# EAGLE board power (EAGLE 9.6.2)
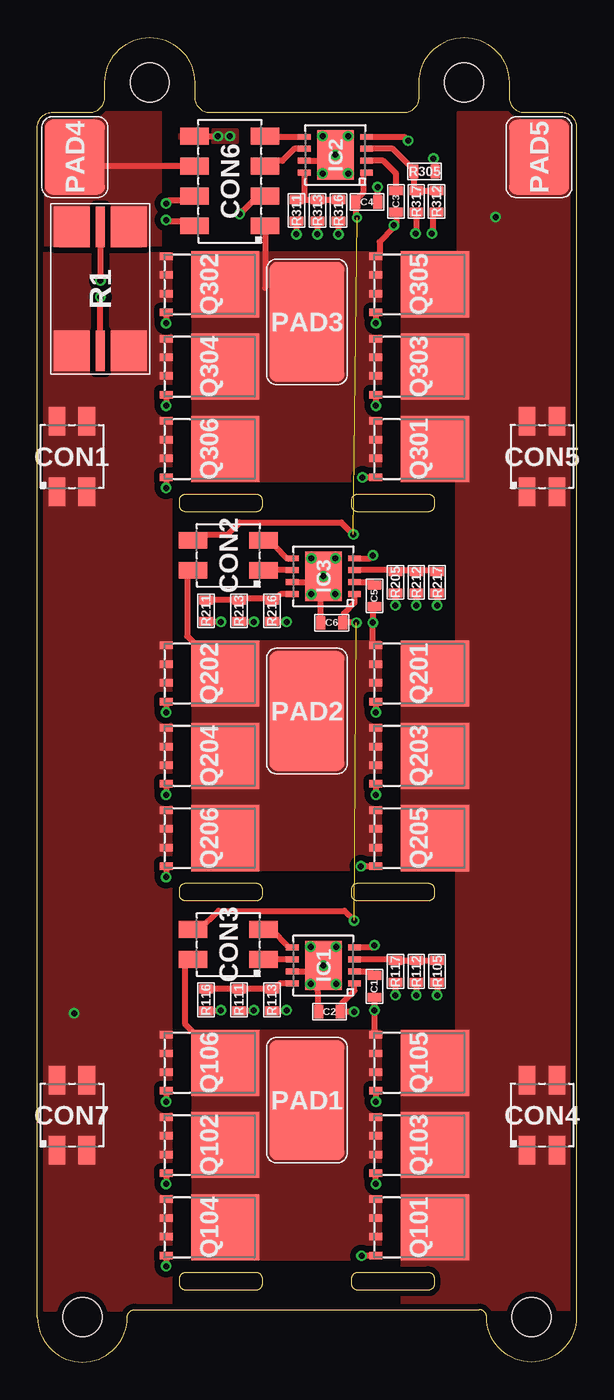
[diagram p0: board, top side]
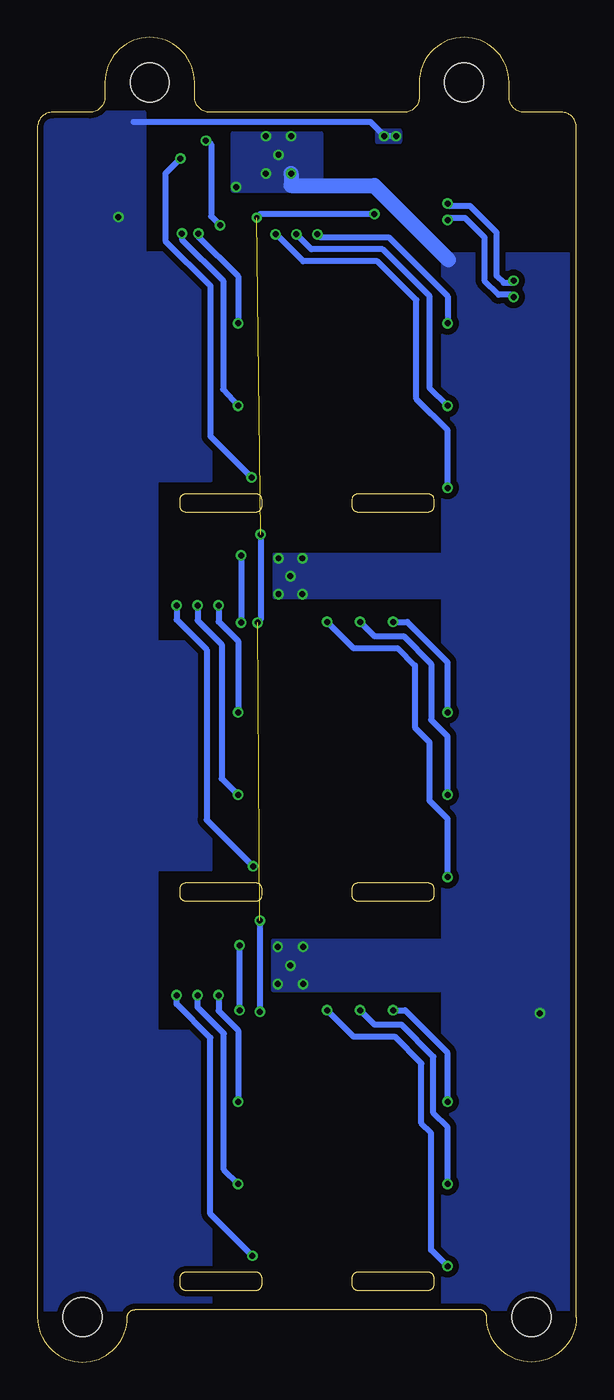
[diagram p1: board, bottom side, seen from below]

Size 36 x 88.5 mm. Coordinates in mm from the lower left corner, seen from the top.
Outline: 30,3 arc90 29.5,3.5 6.5,3.5 arc90 6,3 arc-90 3,0 arc-90 0,3 0,82.5 arc-90 1,83.5 3.5,83.5 arc90 4.5,84.5 4.5,85.5 arc-90 7.5,88.5 arc-90 10.5,85.5 10.5,84.5 arc90 11.5,83.5 24.5,83.5 arc90 25.5,84.5 25.5,85.5 arc-90 28.5,88.5 arc-90 31.5,85.5 31.5,84.5 arc90 32.5,83.5 35,83.5 arc-90 36,82.5 36,3 arc-90 33,0 arc-90 30,3
Outline: 9.9,58 14.6,58 arc-90 15,57.6 15,57.2 arc-90 14.6,56.8 9.9,56.8 arc-90 9.5,57.2 9.5,57.6 arc-90 9.9,58
Outline: 26.5,57.6 26.5,57.2 arc-90 26.1,56.8 21.4,56.8 arc-90 21,57.2 21,57.6 arc-90 21.4,58 26.1,58 arc-90 26.5,57.6
Outline: 9.9,32 14.6,32 arc-90 15,31.6 15,31.2 arc-90 14.6,30.8 9.9,30.8 arc-90 9.5,31.2 9.5,31.6 arc-90 9.9,32
Outline: 26.5,31.6 26.5,31.2 arc-90 26.1,30.8 21.4,30.8 arc-90 21,31.2 21,31.6 arc-90 21.4,32 26.1,32 arc-90 26.5,31.6
Outline: 9.9,6 14.6,6 arc-90 15,5.6 15,5.2 arc-90 14.6,4.8 9.9,4.8 arc-90 9.5,5.2 9.5,5.6 arc-90 9.9,6
Outline: 26.5,5.6 26.5,5.2 arc-90 26.1,4.8 21.4,4.8 arc-90 21,5.2 21,5.6 arc-90 21.4,6 26.1,6 arc-90 26.5,5.6
Copper layers (1*16): Top 0.035mm / dielectric 1mm / Bottom 0.035mm
Design rules "pwrpcb *": minimum track width 0.4mm, minimum drill 0.3mm, track to track 0.4mm, track to pad 0.4mm, pad to pad 0.4mm, via to via 0.4mm, smd to smd 0.15mm, copper to edge 0.4mm, drill to drill 0.4mm, minimum pad ring 0.15mm, minimum via ring 0.15mm, stop-mask expansion 0.41mm, vias tented up to drill 0.41mm, thermal gap 8mil
Net classes: 1 HV: clearance 0.25 mm to class 0, clearance 0.25 mm
Holes 2.6 mm at 7.5,85.5 28.5,85.5 3,3 33,3

## Footprints (pad centres in the part's own frame; a part is rotated, then mirrored left to right if it is on the bottom)
C0603 = smd 0.6 x 0.9: 1 -0.725,0; 2 0.725,0
2X02-SMD-2-MALE = smd 1.9 x 1.12: 1 -2.35,1; 2 2.35,1; 3 -2.35,-1; 4 2.35,-1
2X04-SMD-2-MALE = smd 1.9 x 1.12: 1 -2.35,3; 2 2.35,3; 3 -2.35,1; 4 2.35,1; 5 -2.35,-1; 6 2.35,-1; 7 -2.35,-3; 8 2.35,-3
VDFN-8-HEAVY-PCB = smd 0.85 x 0.4: 1 -2.075,1.2; 2 -2.075,0.4; 3 -2.075,-0.4; 4 -2.075,-1.2; 5 2.075,-1.2; 6 2.075,-0.4; 7 2.075,0.4; 8 2.075,1.2 | smd 2.45 x 3.3: P$1 0,0
5X8 = smd 5 x 8: P$1 0,0
5X4 = smd 5 x 4: P$1 0,0
PG-TDSON-8-1 = smd 0.5 x 0.85: 1 -1.875,-2.9; 2 -0.625,-2.9; 3 0.625,-2.9; 4 1.875,-2.9 | smd 4.41 x 4.55: P$1 0,1.05
R3920-KELVIN = smd 2.7 x 2.4: 1 -4.15,1.9; 2 4.15,1.9; 11 -4.15,-1.9; 22 4.15,-1.9 | smd 2.7 x 0.6: S1 -4.15,0; S2 4.15,0
R0603 = smd 0.6 x 0.9: 1 -0.725,0; 2 0.725,0

## Placement (x,y rotation side)
C1  0.1uF  [C0603]  22.5,25.1 270 top
C2  0.1uF  [C0603]  19.5,23.4 180 top
C3  0.1uF  [C0603]  23.95,77.55 270 top
C4  0.1uF  [C0603]  22,77.5 0 top
C5  0.1uF  [C0603]  22.5,51.2 270 top
C6  0.1uF  [C0603]  19.65,49.4 180 top
CON1  PINHEAD_2X02-0877590414  [2X02-SMD-2-MALE]  2.3,60.5 90 top
CON2  PINHEAD_2X02-0877590414  [2X02-SMD-2-MALE]  12.75,53.9 180 top
CON3  PINHEAD_2X02-0877590414  [2X02-SMD-2-MALE]  12.75,27.9 180 top
CON4  PINHEAD_2X02-0877590414  [2X02-SMD-2-MALE]  33.7,16.5 90 top
CON5  PINHEAD_2X02-0877590414  [2X02-SMD-2-MALE]  33.7,60.5 90 top
CON6  PINHEAD_2X04-SMD-2-MALE  [2X04-SMD-2-MALE]  12.85,78.9 180 top
CON7  PINHEAD_2X02-0877590414  [2X02-SMD-2-MALE]  2.3,16.5 90 top
IC1  UCC272-VDFN-HEAVY_PCB  [VDFN-8-HEAVY-PCB]  19.1,26.5 180 top
IC2  UCC272-VDFN-HEAVY_PCB  [VDFN-8-HEAVY-PCB]  19.9,80.65 180 top
IC3  UCC272-VDFN-HEAVY_PCB  [VDFN-8-HEAVY-PCB]  19.1,52.5 180 top
PAD1  PAD-5X8  [5X8]  18,17.5 180 top
PAD2  PAD-5X8  [5X8]  18,43.5 180 top
PAD3  PAD-5X8  [5X8]  18,69.5 180 top
PAD4  PAD-5X4  [5X4]  2.5,80.5 270 top
PAD5  PAD-5X4  [5X4]  33.5,80.5 270 top
Q101  BSC077N12NS3GATMA1  [PG-TDSON-8-1]  25.5,9 270 top
Q102  BSC077N12NS3GATMA1  [PG-TDSON-8-1]  11.5,14.5 270 top
Q103  BSC077N12NS3GATMA1  [PG-TDSON-8-1]  25.5,14.5 270 top
Q104  BSC077N12NS3GATMA1  [PG-TDSON-8-1]  11.5,9 270 top
Q105  BSC077N12NS3GATMA1  [PG-TDSON-8-1]  25.5,20 270 top
Q106  BSC077N12NS3GATMA1  [PG-TDSON-8-1]  11.5,20 270 top
Q201  BSC077N12NS3GATMA1  [PG-TDSON-8-1]  25.5,46 270 top
Q202  BSC077N12NS3GATMA1  [PG-TDSON-8-1]  11.5,46 270 top
Q203  BSC077N12NS3GATMA1  [PG-TDSON-8-1]  25.5,40.5 270 top
Q204  BSC077N12NS3GATMA1  [PG-TDSON-8-1]  11.5,40.5 270 top
Q205  BSC077N12NS3GATMA1  [PG-TDSON-8-1]  25.5,35 270 top
Q206  BSC077N12NS3GATMA1  [PG-TDSON-8-1]  11.5,35 270 top
Q301  BSC077N12NS3GATMA1  [PG-TDSON-8-1]  25.5,61 270 top
Q302  BSC077N12NS3GATMA1  [PG-TDSON-8-1]  11.5,72 270 top
Q303  BSC077N12NS3GATMA1  [PG-TDSON-8-1]  25.5,66.5 270 top
Q304  BSC077N12NS3GATMA1  [PG-TDSON-8-1]  11.5,66.5 270 top
Q305  BSC077N12NS3GATMA1  [PG-TDSON-8-1]  25.5,72 270 top
Q306  BSC077N12NS3GATMA1  [PG-TDSON-8-1]  11.5,61 270 top
R1  200 µOhms  [R3920-KELVIN]  4.2,71.7 270 top
R105  4R3  [R0603]  26.7,26.1 270 top
R111  4R3  [R0603]  13.45,24.2 270 top
R112  4R3  [R0603]  25.3,26.1 270 top
R113  4R3  [R0603]  15.65,24.2 270 top
R116  4R3  [R0603]  11.25,24.2 270 top
R117  4R3  [R0603]  23.9,26.1 270 top
R205  4R3  [R0603]  23.9,52.1 270 top
R211  4R3  [R0603]  11.25,50.2 270 top
R212  4R3  [R0603]  25.3,52.1 270 top
R213  4R3  [R0603]  13.45,50.2 270 top
R216  4R3  [R0603]  15.65,50.2 270 top
R217  4R3  [R0603]  26.7,52.1 270 top
R305  4R3  [R0603]  25.85,79.55 0 top
R311  4R3  [R0603]  17.3,76.95 270 top
R312  4R3  [R0603]  26.65,77.55 270 top
R313  4R3  [R0603]  18.7,76.95 270 top
R316  4R3  [R0603]  20.1,76.95 270 top
R317  4R3  [R0603]  25.3,77.55 270 top

## Library data of the parts
C1-C6 = rc; AEC-Q: ---; DIGIKEY#: 1276-1006-1-ND; MANF: Samsung Electro-Mechanics; MANF#: CL10B104KA8NNNC; OPERATING_TEMP: -55°C ~ 125°C; PACKAGE: 0603; VOLTAGE: 25V
CON1-CON5 CON7 = pinhead; DIGIKEY#: WM18712-ND; MANF: Molex; MANF#: 0877590414
CON6 = pinhead; DIGIKEY#: WM14802-ND; MANF: Molex; MANF#: 0877590814
IC1-IC3 = mosfet_drivers; DIGIKEY#: 296-UCC27201ADRMRTR-ND; MANF: Texas Instruments; MANF#: UCC27201ADRMR
PAD1-PAD3 = PADS
PAD4 PAD5 = PADS; BOM: EXCLUDE
Q101-Q106 Q201-Q206 Q301-Q306 = mosfet; DIGIKEY#: BSC077N12NS3GATMA1CT-ND; MANF: Infineon Technologies; MANF#: BSC077N12NS3GATMA1; PACKAGE: TDSON-8-1
R1 = SHUNT_RESISTORS; DIGIKEY#: CSS2H-3920R-L200FCT-ND; LCSC#: C469432; MANF: Bourns Inc; MANF#: CSS2H-3920R-L200FCT-ND; OPERATING_TEMP: -55°C ~ 170°C; PACKAGE: 3920; POWER: 12W; TC: ±50ppm/°C; TOLERANCE: ±1%
R105 R111-R113 R116 R117 R205 R211-R213 R216 R217 R305 R311-R313 R316 R317 = rc; AEC-Q: AEC-Q200; DIGIKEY#: 10-ERJ-U03F4R30VCT-ND; MANF: Panasonic Electronic Components; MANF#: ERJ-U03F4R30V; OPERATING_TEMP: -55°C ~ 155°C; PACKAGE: 0603; TOLERANCE: 1%

## Nets
A_GH: IC1.3 R105.1 R112.1 R117.1
A_GL: IC1.8 R111.1 R113.1 R116.1
A_IH: CON3.3 IC1.5
A_IL: CON3.1 IC1.6
A_PH: C1.2 CON3.2 IC1.4 PAD1.P$1 Q101.1 Q101.2 Q101.3 Q102.P$1 Q103.1 Q103.2 Q103.3 Q104.P$1 Q105.1 Q105.2 Q105.3 Q106.P$1
B_GH: IC3.3 R205.1 R212.1 R217.1
B_GL: IC3.8 R211.1 R213.1 R216.1
B_IH: CON2.3 IC3.5
B_IL: CON2.1 IC3.6
B_PH: C5.2 CON2.2 IC3.4 PAD2.P$1 Q201.1 Q201.2 Q201.3 Q202.P$1 Q203.1 Q203.2 Q203.3 Q204.P$1 Q205.1 Q205.2 Q205.3 Q206.P$1
C_GH: IC2.3 R305.1 R312.1 R317.1
C_GL: IC2.8 R311.1 R313.1 R316.1
C_IH: CON6.7 IC2.5
C_IL: CON6.5 IC2.6
C_PH: C3.2 CON6.1 IC2.4 PAD3.P$1 Q301.1 Q301.2 Q301.3 Q302.P$1 Q303.1 Q303.2 Q303.3 Q304.P$1 Q305.1 Q305.2 Q305.3 Q306.P$1
CS+: CON6.2 R1.S2
CS-: CON6.4 R1.S1
N$1: C3.1 IC2.2
N$2: C5.1 IC3.2
N$13: C1.1 IC1.2
PGND: C2.2 C4.2 C6.2 CON1.1 CON1.2 CON1.3 CON1.4 CON7.1 CON7.2 CON7.3 CON7.4 IC1.7 IC1.P$1 IC2.7 IC2.P$1 IC3.7 IC3.P$1 Q102.1 Q102.2 Q102.3 Q104.1 Q104.2 Q104.3 Q106.1 Q106.2 Q106.3 Q202.1 Q202.2 Q202.3 Q204.1 Q204.2 Q204.3 Q206.1 Q206.2 Q206.3 Q302.1 Q302.2 Q302.3 Q304.1 Q304.2 Q304.3 Q306.1 Q306.2 Q306.3 R1.2 R1.22
PHASE_A:N$1 [HV]: Q101.4 R105.2
PHASE_A:N$2: Q102.4 R111.2
PHASE_A:N$3 [HV]: Q103.4 R112.2
PHASE_A:N$4: Q104.4 R113.2
PHASE_A:N$5 [HV]: Q105.4 R117.2
PHASE_A:N$6: Q106.4 R116.2
PHASE_B:N$1 [HV]: Q201.4 R205.2
PHASE_B:N$2: Q202.4 R211.2
PHASE_B:N$3 [HV]: Q203.4 R212.2
PHASE_B:N$4: Q204.4 R213.2
PHASE_B:N$5 [HV]: Q205.4 R217.2
PHASE_B:N$6: Q206.4 R216.2
PHASE_C:N$1 [HV]: Q301.4 R305.2
PHASE_C:N$2: Q302.4 R311.2
PHASE_C:N$3 [HV]: Q303.4 R312.2
PHASE_C:N$4: Q304.4 R313.2
PHASE_C:N$5 [HV]: Q305.4 R317.2
PHASE_C:N$6: Q306.4 R316.2
VBAT-: CON6.6 PAD4.P$1 R1.1 R1.11
VDC [HV]: CON4.1 CON4.2 CON4.3 CON4.4 CON5.1 CON5.2 CON5.3 CON5.4 CON6.8 PAD5.P$1 Q101.P$1 Q103.P$1 Q105.P$1 Q201.P$1 Q203.P$1 Q205.P$1 Q301.P$1 Q303.P$1 Q305.P$1
VDD_15V: C2.1 C4.1 C6.1 CON2.4 CON3.4 CON6.3 IC1.1 IC2.1 IC3.1

## Tracks (layer width: path | path; a pad name or v marks a point on that pad's centre or on a via)
A_GH
  Top 0.4: R105.1 R112.1 R117.1 23.82,26.9 IC1.3
A_GL
  Top 0.4: IC1.8 16.23,25.3 15.85,24.93 R113.1 R111.1 R116.1
A_IH
  Top 0.4: IC1.5 16.8,27.7 15.6,28.9 CON3.3
A_IL
  Top 0.4: IC1.6 CON3.1
A_PH  (via drill 0.4 pad 0.7)
  Top 0.4: C1.2 v22.5,23.5 22.5,21.98 Q105.1 | v22.5,27.85 22.35,27.7 IC1.4 | CON3.2 9.9,26.9 9.85,26.85 9.85,22.6 12.45,20 Q106.P$1
  Bottom 0.4: v22.5,23.5 v22.5,27.85
  pour Top (no thermals): 10.38,22.1 10.38,6.9 22.93,6.9 22.93,22.1
B_GH
  Top 0.4: IC3.3 23.82,52.9 R205.1 23.95,52.88 25.25,52.88 R212.1 25.35,52.88 26.65,52.88 R217.1
B_GL
  Top 0.4: IC3.8 16.25,51.3 15.78,50.83 15.65,50.83 R216.1 15.55,51.02 13.55,51.02 R213.1 R211.1
B_IH
  Top 0.4: CON2.3 15.4,54.6 15.8,54.6 16.7,53.7 IC3.5
B_IL
  Top 0.4: CON2.1 15.25,53.05 15.4,52.9 IC3.6
B_PH  (via drill 0.4 pad 0.7)
  Top 0.4: C5.2 22.4,50.38 v22.4,49.4 22.4,48.08 Q201.1 | IC3.4 22.2,53.7 v22.4,53.9 | CON2.2 10,52.5 10,48.5 12.5,46 Q202.P$1
  Bottom 0.4: v22.4,53.9 v22.4,49.4
  pour Top (no thermals): 10.38,48.1 10.38,32.9 22.93,32.9 22.93,48.1
C_GH
  Top 0.4: IC2.3 23.73,81.05 25.12,79.66 R305.1 25.12,78.45 R317.1 R312.1
C_GL
  Top 0.4: IC2.8 17.82,77.7 17.8,77.67 R311.1 R313.1 R316.1
C_IH
  Top 0.4: IC2.5 15.25,81.85 CON6.7
C_IL
  Top 0.4: IC2.6 17.15,81.05 16.35,80.25 15.55,80.25 CON6.5
C_PH  (via drill 0.4 pad 0.7)
  Top 0.4: C3.2 23.95,75.95 v23.8,75.95 23.8,75.78 22.85,74.83 22.85,73.92 22.8,73.88 Q305.1 | v24.75,81.6 24.5,81.85 IC2.4 | CON6.1 15.2,71.78
  Bottom 0.4: v24.75,81.6 24.65,81.6 24.4,81.35 24.4,76.55 v23.8,75.95
  pour Top (no thermals): 10.38,74.1 10.38,58.9 22.93,58.9 22.93,74.1
CS+  (via drill 0.4 pad 0.7)
  Top 0.4: R1.S2 v4.2,71.15 | CON6.2 10.2,76.2 8.7,76.2 v8.6,76.3
  Bottom 0.4: v8.6,76.3 8.45,76.45 7.45,76.45 6.15,75.15 6.15,72.25 5.2,71.3 4.35,71.3 v4.2,71.15
CS-  (via drill 0.4 pad 0.7)
  Top 0.4: R1.S1 v4.2,72.25 | CON6.4 10.2,77.6 8.8,77.6 v8.6,77.4
  Bottom 0.4: v8.6,77.4 8.45,77.25 7.12,77.25 5.35,75.48 5.35,72.58 4.87,72.1 4.35,72.1 v4.2,72.25
N$1
  Top 0.4: C3.1 23.95,79.4 23.1,80.25 IC2.2
N$2
  Top 0.4: IC3.2 22.32,52.1 C5.1
N$13
  Top 0.4: IC1.2 22.23,26.1 C1.1
PGND  (via drill 0.4 pad 0.7)
  Top 0.4: IC2.7 19.5,80.25 IC2.P$1 | IC3.7 18.7,52.1 IC3.P$1 18.93,52.33 C6.2 | IC1.7 18.5,26.1 18.9,26.5 IC1.P$1 18.7,26.1 C2.2 | C4.2 v22.73,78.5
  Bottom 1: v19.05,79.4 19.05,78.6 13.5,78.6 8.55,73.65
  other vias: 19.1,52.5 19.9,53.7 18.3,53.7 18.3,51.3 19.9,51.3 19.9,80.65 20.75,79.4 20.75,81.9 19.05,81.9 18.25,27.75 19.95,27.75 18.25,25.25 19.95,25.25 19.1,26.5 2.45,23.3
  pour Top (no thermals): 8.93,3.5 8.93,74.05 0,74.05 0,3.5
  pour Bottom (no thermals): 8.93,3.5 8.93,24.8 20.3,24.8 20.3,28.2 8.93,28.2 8.93,51.05 20.2,51.05 20.2,54 8.93,54 8.93,74.05 -1,74.05 -1,3.5
  pour Bottom: 17.1,82.05 17.1,78.3 22.9,78.3 22.9,82.05
PHASE_A:N$1  (via drill 0.4 pad 0.7)
  Top 0.4: Q101.4 22.57,7.1 v21.65,7.1 | R105.2 v26.7,24.5
  Bottom 0.4: v21.65,7.1 24.45,9.9 24.45,21.67 26.7,23.92 v26.7,24.5
PHASE_A:N$2  (via drill 0.4 pad 0.7)
  Top 0.4: R111.2 13.47,23.5 v14.45,23.5 | Q102.4 v8.6,11.9
  Bottom 0.4: v8.6,11.9 8.6,15.7 9.55,16.65 9.55,20.4 11.7,22.55 13.5,22.55 v14.45,23.5
PHASE_A:N$3  (via drill 0.4 pad 0.7)
  Top 0.4: v22.6,11.9 Q103.4 | R112.2 v25.3,24.5
  Bottom 0.4: v25.3,24.5 25.3,23.7 23.55,21.95 23.55,12.85 v22.6,11.9
PHASE_A:N$4  (via drill 0.4 pad 0.7)
  Top 0.4: R113.2 15.68,23.5 v16.65,23.5 | Q104.4 v8.6,6.4
  Bottom 0.4: v8.6,6.4 9.7,7.5 9.7,15.3 10.35,15.95 10.35,19.95 12.15,21.75 14.9,21.75 v16.65,23.5
PHASE_A:N$5  (via drill 0.4 pad 0.7)
  Top 0.4: Q105.4 v22.6,17.4 | R117.2 v23.9,24.5
  Bottom 0.4: v23.9,24.5 23.9,23.48 22.6,22.18 v22.6,17.4
PHASE_A:N$6  (via drill 0.4 pad 0.7)
  Top 0.4: R116.2 11.28,23.5 v12.25,23.5 | Q106.4 v8.6,17.4
  Bottom 0.4: v8.6,17.4 8.6,20.65 11.45,23.5 v12.25,23.5
PHASE_B:N$1  (via drill 0.4 pad 0.7)
  Top 0.4: Q201.4 v22.6,43.4 | R205.2 v23.9,50.55
  Bottom 0.4: v23.9,50.55 23.9,49.48 22.6,48.17 v22.6,43.4
PHASE_B:N$2  (via drill 0.4 pad 0.7)
  Top 0.4: Q202.4 v8.6,43.4 | v12.25,49.45 11.28,49.45 R211.2
  Bottom 0.4: v8.6,43.4 8.6,46.75 11.3,49.45 v12.25,49.45
PHASE_B:N$3  (via drill 0.4 pad 0.7)
  Top 0.4: Q203.4 v22.6,37.9 | R212.2 v25.3,50.55
  Bottom 0.4: v22.6,37.9 23.7,38.98 23.7,47.94 25.3,49.54 v25.3,50.55
PHASE_B:N$4  (via drill 0.4 pad 0.7)
  Top 0.4: Q204.4 v8.6,37.9 | v14.45,49.45 13.47,49.45 R213.2
  Bottom 0.4: v8.6,37.9 8.6,41.8 9.7,42.9 9.7,46.65 11.55,48.5 13.5,48.5 v14.45,49.45
PHASE_B:N$5  (via drill 0.4 pad 0.7)
  Top 0.4: Q205.4 v21.6,33.12 | R217.2 v26.7,50.55
  Bottom 0.4: v26.7,50.55 26.7,49.6 24.7,47.6 24.7,36.23 v21.6,33.12
PHASE_B:N$6  (via drill 0.4 pad 0.7)
  Top 0.4: Q206.4 v8.6,32.4 | v16.65,49.45 15.68,49.45 R216.2
  Bottom 0.4: v8.6,32.4 8.6,36.3 9.8,37.5 9.8,41.4 10.8,42.4 10.8,46.55 11.95,47.7 14.9,47.7 v16.65,49.45
PHASE_C:N$1  (via drill 0.4 pad 0.7)
  Top 0.4: Q301.4 22.57,59.1 v21.7,59.1 | R305.2 26.57,80.4 v26.45,80.4
  Bottom 0.4: v26.45,80.4 27.45,79.4 27.45,74.9 24.45,71.9 24.45,61.85 v21.7,59.1
PHASE_C:N$2  (via drill 0.4 pad 0.7)
  Top 0.4: R311.2 v17.3,75.35 | Q302.4 v8.6,69.4
  Bottom 0.4: v17.3,75.35 17.1,75.15 12.55,75.15 8.6,71.2 v8.6,69.4
PHASE_C:N$3  (via drill 0.4 pad 0.7)
  Top 0.4: Q303.4 v22.6,63.9 | R312.2 26.4,76.58 26.4,75.45 v26.35,75.4
  Bottom 0.4: v26.35,75.4 26.35,75 23.6,72.25 23.6,65 v22.6,63.9
PHASE_C:N$4  (via drill 0.4 pad 0.7)
  Top 0.4: R313.2 v18.7,75.35 | Q304.4 v8.6,63.9
  Bottom 0.4: v8.6,63.9 9.8,65.08 9.8,71.2 12.95,74.35 17.7,74.35 v18.7,75.35
PHASE_C:N$5  (via drill 0.4 pad 0.7)
  Top 0.4: R317.2 25.3,75.45 v25.25,75.4 | Q305.4 v22.6,69.4
  Bottom 0.4: v25.25,75.4 25.25,75.2 22.6,72.55 v22.6,69.4
PHASE_C:N$6  (via drill 0.4 pad 0.7)
  Top 0.4: R316.2 v20.1,75.35 | Q306.4 v8.6,58.4
  Bottom 0.4: v8.6,58.4 8.6,62.25 10.7,64.35 10.7,70.95 13.3,73.55 18.25,73.55 20.05,75.35 v20.1,75.35
VBAT-
  Top 0.4: CON6.6 3,79.9 PAD4.P$1
  pour Top (rank 2, no thermals): 0.52,83.5 8.22,83.5 8.22,73.88 0.52,73.88
VDC  (via drill 0.4 pad 0.7)
  Top 0.4: CON6.8 v12.05,81.9
  Bottom 0.4: v12.05,81.9 12.8,81.9 13.75,82.85 29.6,82.85
  other vias: 30.6,76.5 12.85,81.9
  pour Top (no thermals): 24.38,3.5 24.38,22.1 28,22.1 28,32.9 24.38,32.9 24.38,48.1 28,48.1 28,58.9 24.38,58.9 24.38,74.1 28.1,74.1 28.1,83.5 36,83.5 36,3.5
  pour Bottom (no thermals): 24.38,3.5 24.38,22.1 28,22.1 28,32.9 24.38,32.9 24.38,48.1 28,48.1 28,58.9 24.38,58.9 24.38,74.1 28.8,74.1 28.8,83.5 37,83.5 37,3.5
  pour Top: 9.6,82.25 13.25,82.25 13.25,81.55 9.6,81.55
  pour Bottom: 13.25,82.25 11.85,82.25 11.85,81.55 13.25,81.55
VDD_15V  (via drill 0.35, 0.4 pad 0.7)  (2 unrouted)
  Top 0.4: CON2.4 10.75,55.25 12.65,55.25 13.5,56.1 20.3,56.1 v21.1,55.3 | v21.3,49.4 C6.1 20.48,49.5 20.48,50.02 21.18,50.73 IC3.1 | 21.3,25.3 IC1.1 21.18,24.8 20.32,23.95 20.32,23.5 C2.1 v21.15,23.4 | IC2.1 21.82,79.45 21.75,79.38 21.75,78.14 21.27,77.66 C4.1 21.27,76.53 v21.35,76.45 | CON3.4 10.85,28.9 12.1,30.15 20.5,30.15 v21.15,29.5 | CON6.3 14.7,77.9 v13.5,76.7
  Bottom 0.4: v21.1,55.3 21.1,49.6 v21.3,49.4 | v21.15,29.5 v21.15,23.4 | v13.5,76.7 21.1,76.7 v21.35,76.45